# Altium PCB PCB1.PcbDoc
Units mil, origin at the board's own origin, x right, y up, seen from the top; angles counter-clockwise.
Board outline 1262.08 x 375.18 mil, 2 copper layers (Top Layer, Bottom Layer); 12 components, 12 nets, 61 pads, 11 vias.
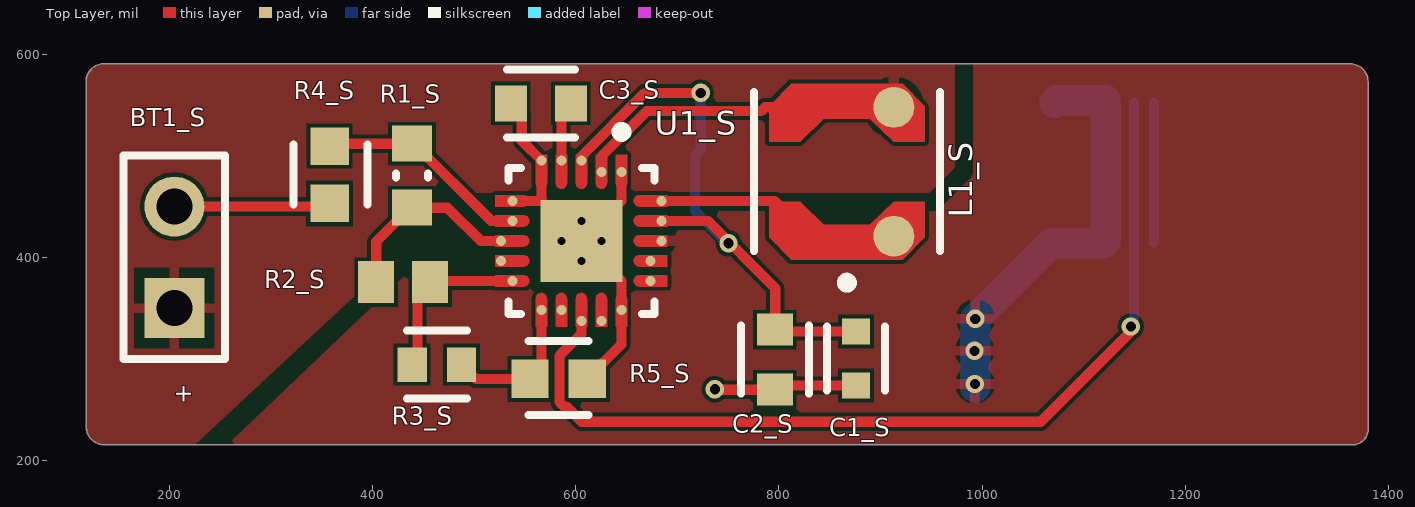
[diagram p0: Top Layer view]
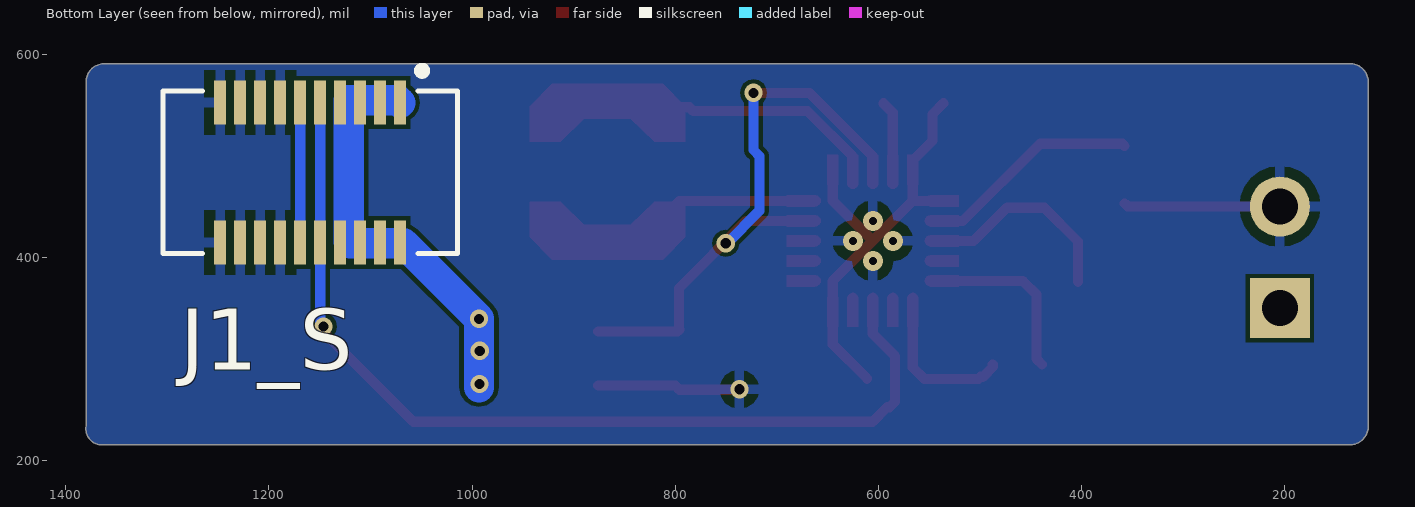
[diagram p1: Bottom Layer view, seen from below]
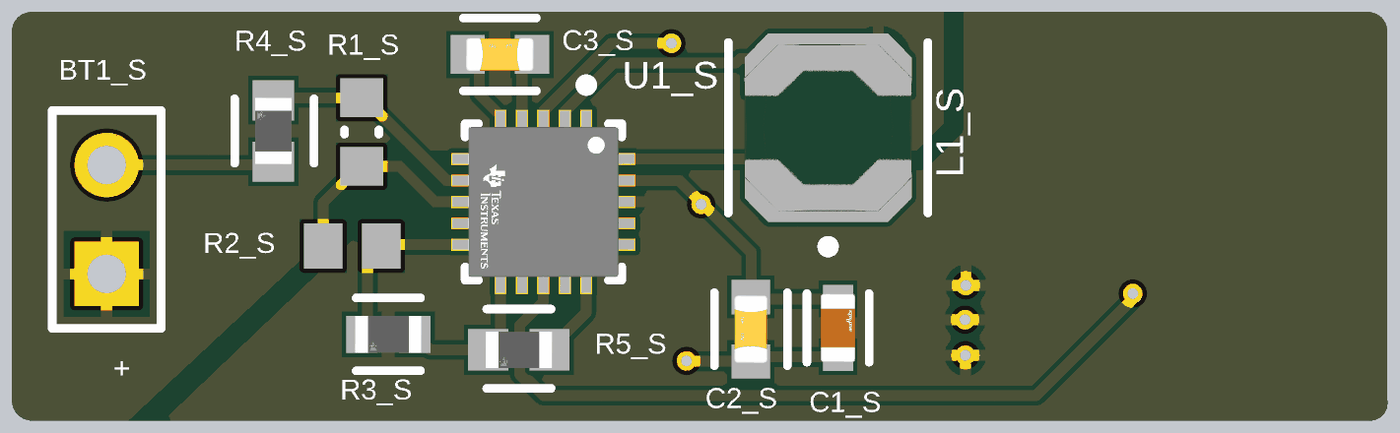
[diagram p2: 3D render of the assembled board from above, using the file's embedded part models]

## Layer stack, top to bottom
Top Solder: solder mask 0.4, Solder Resist, Dk 3.5
Top Layer: signal copper 1.4
Dielectric 1: dielectric 12.6, FR-4, Dk 4.8
Bottom Layer: signal copper 1.4
Bottom Solder: solder mask 0.4, Solder Resist, Dk 3.5

## Board outline
118.13,234.25 118.11,572.04 118.13,572.05 cw(c135.83,572.83) 136.22,590.55 1361.4,590.55 1361.42,590.53 cw(c1362.2,572.84) 1379.92,572.44 1379.92,234.25 cw(c1364.2,231.25) 1366.14,215.37 137.01,215.37 cw(c136.4,233.64)

## Design rules (kind name [scope] priority, off if disabled: settings)
Clearance [All] p1: gap=4 ignorepadtopadclearanceinfootprint=FALSE
PolygonConnect [All] p1: connectstyle=Relief reliefconductorwidth=10 reliefentries=4 polygonreliefangle="90 Angle" airgapwidth=10
RoutingVias [All] p1: holewidth=10 width=20 viastyle="Through Hole" minholewidth=8 minwidth=18 maxholewidth=28 maxwidth=50
SolderMaskExpansion [All] p1: expansion=4 istentingtop=FALSE
Width [All] p1: maxlimit=50 minlimit=4 preferedwidth=10
30 further rules are at their usual default settings.

## Components (designator, comment, footprint, x,y, rotation, side; value= is the part's Value field where it differs from the comment)
BT1_S "Solar cell" BAT-2 205,400 r90 top
C1_S "GRM188R60J475KE19D" FP-GRM188-0_1-MFG 875.98,300.39 r90 top
C2_S "CC0603KRX7R9BB103" FP-CC0603-DA-MFG 796.06,299.21 r270 top value="10 nF"
C3_S "CC0603KRX7R9BB103" FP-CC0603-DA-MFG 565.75,551.57 r180 top value="10 nF"
J1_S "53916-0208" "MOLEX-  539160208" 1159.45,473.62 r0 bottom
L1_S "LPS4018-223MRC" FP-LPS4018-MFG 866.93,484.25 r90 top
R1_S "7M32 1% 0603(1608)" RESC0603(1608)_N 438.98,480.31 r270 top value="7320000.00 Ohm"
R2_S "CRCW06031M87FKEA" RESC1609X50X30ML10T20 430.31,375.59 r180 top
R3_S "CRCW06035M49FKEA" FP-CRCW0603-e3-IPC_C 463.39,294.49 r180 top
R4_S "CRCW06035M62FKEA" FP-CRCW0603-e3-IPC_B 357.87,481.28 r90 top
R5_S "CRCW06035M62FKEA" FP-CRCW0603-e3-IPC_B 583.25,280.31 r180 top
U1_S "BQ25570RGRR" FP-RGR0020A-MFG 605.71,416.14 r270 top

## Footprints (in the part's own frame and the unit in brackets; to place one, negate y for a bottom-side part, rotate by r counter-clockwise, add the part's x,y. Pads: shape width x height; smd on the part's side, far side on the other; paste and mask are expansions set on the pad)
BAT-2 [mm] "Battery; 2 Leads"
  rect 1.5x1.5 hole 0.9: 1(-1.27,0)
  round 1.5 hole 0.9: 2(1.27,0)
  silkscreen extent -2.54,-1.27 2.54,1.27
FP-CC0603-DA-MFG [mm]
  rect 0.8x0.9 smd paste+0 mask+0: 1(-0.75,0) 2(0.75,0)
  silkscreen extent -0.85,-0.85 0.85,0.85, body extent -1.35,-0.75 1.35,0.75, height 0.25
FP-CRCW0603-e3-IPC_B [mil]
  rect 36.81x37.88 smd paste+0 mask+0: 1(-28.17,0) 2(28.17,0)
  silkscreen extent -30,-37 30,35, body extent -56,-29 56,29, height 10
FP-CRCW0603-e3-IPC_C [mil]
  rect 28.94x33.94 smd paste+0 mask+0: 1(-24.23,0) 2(24.23,0)
  silkscreen extent -30,-33 30,33, body extent -43,-23 43,23, height 10
FP-GRM188-0_1-MFG [mm]
  rect 0.65x0.7 smd paste+0 mask+0: 1(-0.675,0) 2(0.675,0)
  silkscreen extent -0.8,-0.72 0.8,0.72, body extent -1.1,-0.55 1.1,0.55, height 0.25
FP-LPS4018-MFG [mil]
  round 40.39 smd paste+0 mask+0: 1(-63.42,-46.25) 2(63.42,-46.25)
  Top Layer region: 86.61,-54.92 86.61,54.92 64.57,76.57 29.53,76.57 29.53,46.06 52.36,22.64 52.36,-22.64 29.53,-46.06 29.53,-76.57 64.57,-76.57
  Top Layer region: -86.61,-54.92 -86.61,54.92 -64.57,76.57 -29.53,76.57 -29.53,46.06 -52.36,22.64 -52.36,-22.64 -29.53,-46.06 -29.53,-76.57 -64.57,-76.57
  silkscreen extent -114,-92 78,92, body extent -91,-82 91,82, height 10
FP-RGR0020A-MFG [mm]
  round 0.252 smd paste-1000 mask+0: 1(-1.725,1) 2(-1.725,0.5) 3(-2.01,0) 4(-2.01,-0.5) 5(-2.01,-1) 6(-1,-1.725) 7(-0.5,-1.725) 8(0,-2.01) 9(0.5,-2.01) 10(1,-1.725) 11(1.725,-1) 12(1.725,-0.5) 13(2,0) 14(2,0.5) 15(1.725,1) 16(1,1.725) 17(0.5,1.725) 18(0,2) 19(-0.5,2) 20(-1,2)
  rect 2.05x2.05 smd paste-1000 mask+0: 21(0,0)
  Top Layer region: -0.86,2.15 -0.86,1.44 -0.871,1.386 -0.901,1.341 -0.946,1.311 -1,1.3 -1,1.3 -1.054,1.311 -1.099,1.341 -1.129,1.386 -1.14,1.44 -1.14,1.44 -1.14,2.15
  Top Layer region: -0.36,2.15 -0.36,1.44 -0.371,1.386 -0.401,1.341 -0.446,1.311 -0.5,1.3 -0.5,1.3 -0.554,1.311 -0.599,1.341 -0.629,1.386 -0.64,1.44 -0.64,1.44 -0.64,2.15
  Top Layer region: 0.14,2.15 0.14,1.44 0.129,1.386 0.099,1.341 0.054,1.311 0,1.3 0,1.3 -0.054,1.311 -0.099,1.341 -0.129,1.386 -0.14,1.44 -0.14,1.44 -0.14,2.15
  Top Layer region: 0.64,2.15 0.64,1.44 0.629,1.386 0.599,1.341 0.554,1.311 0.5,1.3 0.5,1.3 0.446,1.311 0.401,1.341 0.371,1.386 0.36,1.44 0.36,1.44 0.36,2.15
  Top Layer region: 1.14,2.15 1.14,1.44 1.129,1.386 1.099,1.341 1.054,1.311 1,1.3 1,1.3 0.946,1.311 0.901,1.341 0.871,1.386 0.86,1.44 0.86,1.44 0.86,2.15
  Top Layer region: 2.15,0.86 1.44,0.86 1.386,0.871 1.341,0.901 1.311,0.946 1.3,1 1.3,1 1.311,1.054 1.341,1.099 1.386,1.129 1.44,1.14 1.44,1.14 2.15,1.14
  Top Layer region: 2.15,0.36 1.44,0.36 1.386,0.371 1.341,0.401 1.311,0.446 1.3,0.5 1.3,0.5 1.311,0.554 1.341,0.599 1.386,0.629 1.44,0.64 1.44,0.64 2.15,0.64
  Top Layer region: 2.15,-0.14 1.44,-0.14 1.386,-0.129 1.341,-0.099 1.311,-0.054 1.3,0 1.3,0 1.311,0.054 1.341,0.099 1.386,0.129 1.44,0.14 1.44,0.14 2.15,0.14
  Top Layer region: 2.15,-0.64 1.44,-0.64 1.386,-0.629 1.341,-0.599 1.311,-0.554 1.3,-0.5 1.3,-0.5 1.311,-0.446 1.341,-0.401 1.386,-0.371 1.44,-0.36 1.44,-0.36 2.15,-0.36
  Top Layer region: 2.15,-1.14 1.44,-1.14 1.386,-1.129 1.341,-1.099 1.311,-1.054 1.3,-1 1.3,-1 1.311,-0.946 1.341,-0.901 1.386,-0.871 1.44,-0.86 1.44,-0.86 2.15,-0.86
  Top Layer region: 0.86,-2.15 0.86,-1.44 0.871,-1.386 0.901,-1.341 0.946,-1.311 1,-1.3 1,-1.3 1.054,-1.311 1.099,-1.341 1.129,-1.386 1.14,-1.44 1.14,-1.44 1.14,-2.15
  Top Layer region: 0.36,-2.15 0.36,-1.44 0.371,-1.386 0.401,-1.341 0.446,-1.311 0.5,-1.3 0.5,-1.3 0.554,-1.311 0.599,-1.341 0.629,-1.386 0.64,-1.44 0.64,-1.44 0.64,-2.15
  Top Layer region: -0.14,-2.15 -0.14,-1.44 -0.129,-1.386 -0.099,-1.341 -0.054,-1.311 0,-1.3 0,-1.3 0.054,-1.311 0.099,-1.341 0.129,-1.386 0.14,-1.44 0.14,-1.44 0.14,-2.15
  Top Layer region: -0.64,-2.15 -0.64,-1.44 -0.629,-1.386 -0.599,-1.341 -0.554,-1.311 -0.5,-1.3 -0.5,-1.3 -0.446,-1.311 -0.401,-1.341 -0.371,-1.386 -0.36,-1.44 -0.36,-1.44 -0.36,-2.15
  Top Layer region: -1.14,-2.15 -1.14,-1.44 -1.129,-1.386 -1.099,-1.341 -1.054,-1.311 -1,-1.3 -1,-1.3 -0.946,-1.311 -0.901,-1.341 -0.871,-1.386 -0.86,-1.44 -0.86,-1.44 -0.86,-2.15
  Top Layer region: -2.15,-0.86 -1.44,-0.86 -1.386,-0.871 -1.341,-0.901 -1.311,-0.946 -1.3,-1 -1.3,-1 -1.311,-1.054 -1.341,-1.099 -1.386,-1.129 -1.44,-1.14 -1.44,-1.14 -2.15,-1.14
  Top Layer region: -2.15,-0.36 -1.44,-0.36 -1.386,-0.371 -1.341,-0.401 -1.311,-0.446 -1.3,-0.5 -1.3,-0.5 -1.311,-0.554 -1.341,-0.599 -1.386,-0.629 -1.44,-0.64 -1.44,-0.64 -2.15,-0.64
  Top Layer region: -2.15,0.14 -1.44,0.14 -1.386,0.129 -1.341,0.099 -1.311,0.054 -1.3,0 -1.3,0 -1.311,-0.054 -1.341,-0.099 -1.386,-0.129 -1.44,-0.14 -1.44,-0.14 -2.15,-0.14
  Top Layer region: -2.15,0.64 -1.44,0.64 -1.386,0.629 -1.341,0.599 -1.311,0.554 -1.3,0.5 -1.3,0.5 -1.311,0.446 -1.341,0.401 -1.386,0.371 -1.44,0.36 -1.44,0.36 -2.15,0.36
  Top Layer region: -2.15,1.14 -1.44,1.14 -1.386,1.129 -1.341,1.099 -1.311,1.054 -1.3,1 -1.3,1 -1.311,0.946 -1.341,0.901 -1.386,0.871 -1.44,0.86 -1.44,0.86 -2.15,0.86
  silkscreen extent -2.85,-1.83 1.83,1.83, body extent -2.25,-2.25 2.25,2.25, height 0.25
"MOLEX-  539160208" [mm]
  rect 0.3x1.1 smd: 1(-2.25,1.5) 2(-2.25,-2) 3(-1.75,1.5) 4(-1.75,-2) 5(-1.25,1.5) 6(-1.25,-2) 7(-0.75,1.5) 8(-0.75,-2) 9(-0.25,1.5) 10(-0.25,-2) 11(0.25,1.5) 12(0.25,-2) 13(0.75,1.5) 14(0.75,-2) 15(1.25,1.5) 16(1.25,-2) 17(1.75,1.5) 18(1.75,-2) 19(2.25,1.5) 20(2.25,-2)
  silkscreen extent -3.68,-2.89 3.68,1.78, body extent -3.65,-2.3 3.65,1.8, height 3.46
RESC0603(1608)_N [mm] "Chip Resistor, Body 1.6x0.8mm, IPC Medium Density"
  rect 0.9x1 smd: 1(-0.8,0) 2(0.8,0)
  silkscreen extent -0.05,-0.4 0.05,0.4, body extent -0.85,-0.47 0.85,0.47, height 0.6
RESC1609X50X30ML10T20 [mm] "Chip Resistor, 2-Leads, Body 1.55x0.85mm, IPC Low Density"
  rect 0.9x1.05 smd: 1(-0.675,0) 2(0.675,0)
  body extent -0.82,-0.48 0.82,0.48, height 0.5

## Part data
BT1_S: library part Battery, "Multicell Battery", LatestRevisionDate=17-Jul-2002, LatestRevisionNote="Re-released for DXP Platform.", PackageDescription="Battery; 2 Leads", PackageReference=BAT-2, Published=24-Mar-1999, Publisher="Altium Limited"
C1_S: library part CMP-2006-02799-3, "CAP CER 4.7UF 6.3V X5R 0603", Capacitance=4.7uF, Case Code (Imperial)=0603, Case Code (Metric)=1608, Dielectric=X5R, Max Operating Temperature=85°C, Min Operating Temperature=-55°C, Package Quantity=1, Tolerance=10%, Voltage=6.3V, Case/Package=0603, Depth=0.8mm, Height=0.8mm, Lead Free="Lead Free", Length=1.6mm, Material=Ceramic, Mount="Surface Mount", Packaging="Tape and Reel", Radiation Hardening=No, REACH SVHC="No SVHC", RoHS Compliant=Yes, Termination=SMD/SMT, Thickness=0.035inch, Voltage Rating=6.3V, Voltage Rating (DC)=6.3V, Width=0.8mm
C2_S C3_S: library part CMP-2100-03600-2, "CAP CER 10000PF 50V X7R 0603", Capacitance="10 nF", Manufacturer=YAGEO, Package=CC0603-DA, Temperature="-55°C to +125°C", Temperature Characteristic=X7R, Temperature Coefficient=15%, Temperature Range High=+125°C, Temperature Range Low=-55°C, Tolerance=0.1, Voltage="50 V", Automotive=No, Category=Cap, ComponentLink2Description=Datasheet, ComponentLink2URL=http://www.yageo.com/documents/recent/UPY-GPHC_X7R_6.3V-to-50V_18.pdf, Device Class L1="Passive Components", Device Class L2=Capacitors, Device Class L3="Ceramic Capacitors", Digikey Description="CAP CER 10000PF 50V X7R 0603", Footprint Url=http://www.yageo.com/exep/pages/download/literatures/UPY-C_GEN_24.pdf, Height=0.9mm, Lead Free=Yes, Manufacturer Part Number=CC0603KRX7R9BB103, Material=Ceramic, Mouser Description="Multilayer Ceramic Capacitor, CC Series, 0.01 - F, - 10%, X7R, 50 V, 0603 [1608 Metric]", Octopart=https://octopart.com/cc0603krx7r9bb103-yageo-192938, RoHS=TRUE, Voltage Rating="50 V"
L1_S: library part CMP-11268-000029-2, "Fixed Inductors LPS4018 Low Profile 22uH 0.9A 20% SMD", Case/Package=SMD/SMT, DC Resistance (DCR)=360mR, Inductance=22uH, Max DC Current=830mA, Max Operating Temperature=85°C, Min Operating Temperature=-40°C, Package Quantity=1000, Self Resonant Frequency=26MHz, Test Frequency=100kHz, Tolerance=20%, Core Material=Ferrite, Height=1.7mm, Length=4mm, Packaging="Tape and Reel", Series=LPS4018, Shielding=Shielded, Termination=SMD/SMT, Weight=0.003527oz, Width=4mm
R1_S: library part CMP-1012-00947-1, "7M32 0.1W 1% 0603 (1608 Metric)  SMD", Case-EIA=0603, Case-Metric=1608, Power="0.1 W", Tolerance="1 %", Technology=SMT
R2_S: library part CMP-1012-00878-2, Manufacturer="Vishay Dale", Part Number=CRCW06031M87FKEA
R3_S: library part CMP-02407-002627-1, "RES Thick Film, 5.49MΩ, 1%, 0.1W, 100ppm/°C, 0603", Case Code (Imperial)=0603, Case Code (Metric)=1608, Max Operating Temperature=155°C, Max Power Dissipation=100mW, Min Operating Temperature=-55°C, Package Quantity=10, Resistance=5.49MR, Temperature Coefficient=100ppm/°C, Tolerance=1%, Voltage Rating=75V, Case/Package=0603, Composition="Thick Film", Contact Plating=Tin, Depth=0.85mm, Features="Automotive AEC-Q200", Height=0.02inch, Lead Free="Lead Free", Length=1.55mm, Military Standard=Not, Number of Pins=2, Number of Terminations=2, Packaging="Tape and Reel", Power Rating=100mW, Radiation Hardening=No, Termination=SMD/SMT, Voltage Rating (DC)=75V, Weight=7.1E-05oz, Width=0.033inch
R4_S R5_S: library part CMP-02407-011800-1, "RES Thick Film, 5.62MΩ, 1%, 0.1W, 100ppm/°C, 0603", Case Code (Imperial)=0603, Case Code (Metric)=1608, Max Operating Temperature=155°C, Max Power Dissipation=100mW, Min Operating Temperature=-55°C, Package Quantity=10, Resistance=5.62MR, Resistance Tolerance=1%, Resistor Type="Thick Film", Temperature Coefficient=100ppm/°C, Voltage Rating=75V, Case/Package=0603, Construction=Rectangular, Contact Plating=Tin, Depth=0.85mm, Features="Automotive AEC-Q200", Height=0.02inch, Lead Free="Lead Free", Length=1.55mm, Military Standard=Not, Number of Pins=2, Number of Terminations=2, Packaging="Tape and Reel", Power Rating=100mW, RoHS Compliant=Yes, Series=CRCW, Tolerance=1%, Voltage Rating (DC)=75V, Weight=7.1E-05oz, Width=0.033inch
U1_S: library part CMP-04911-000040-1, "IC ENERGY HARV CTRLR BATT 20VQFN", Case/Package=VQFN, Max Operating Temperature=125°C, Min Operating Temperature=-40°C, Operating Supply Current=488nA, Operating Supply Voltage=4V, Output Current=100mA, Package Quantity=3000, Switching Frequency=1MHz, Contact Plating=Gold, Lead Free="Lead Free", Mount="Surface Mount", Number of Pins=20, Packaging="Tape and Reel", RoHS Compliant=Yes

## Via types
v1: diameter 18, hole 10, Top Layer to Bottom Layer, 7 vias
v2: diameter 19.68, hole 7.87, Top Layer to Bottom Layer, 4 vias

## Nets (pads, with @x,y where several pads share a name; then routed paths per layer and width w, separated by ;. In a path a pad name is that pad's centre, name@x,y a point inside that pad or via, vN(x,y) a via of type N, cw(c..) or ccw(c..) an arc to the next point about the centre after c; other vN are vias at no path point)
AIN0: J1_S.9 J1_S.10 U1_S.13 | length 929.7
  Top Layer w10: 605.71,344.29 U1_S.13 605.71,324.68 584.01,302.98 584.01,257.65 589.28,252.38 591.72,252.38 605.91,238.19 1057.87,238.19 1146.46,326.77 v1(1146.46,331.89)
  Bottom Layer w10: v1(1146.46,331.89) 1146.46,334.05 1149.61,337.2 J1_S.9 J1_S.10
AIN1: J1_S.11 J1_S.12 | length 137.8
  Bottom Layer w10: J1_S.11 J1_S.12
EH_VOUT: J1_S.1 J1_S.2 J1_S.3 J1_S.4 J1_S.5 J1_S.6 J1_S.7 J1_S.8 U1_S.18 | length 418.3
  Bottom Layer w30: v1@993.31,272.05 v1(993.31,339.45) 1067.64,413.78 1120.08,413.78 1121.65,415.35 1121.65,554.72 1073.23,554.72 J1_S.2
  other v1: 992.91,275.28 992.52,307.95
GND: BT1_S.2 C1_S.1 C2_S.2 C3_S.2 J1_S.13 J1_S.14 J1_S.15 J1_S.16 J1_S.17 J1_S.18 J1_S.19 J1_S.20 R4_S.1 R5_S.1 U1_S.1 U1_S.5 U1_S.6 U1_S.15 U1_S.21 | length 738.1
  Top Layer w10: BT1_S.2 354.76,450 R4_S.1 ; C3_S.2 546.97,540.83 546.97,514.65 U1_S.5 U1_S.21@566.34,455.51 ; U1_S.6 U1_S.21@566.34,455.51 ; R5_S.1 611.42,280.85 645.08,314.51 645.08,376.77 U1_S.21 ; U1_S.1 645.08,455.51 U1_S.21 ; v1(737.01,270.08) 737.4,269.69 C2_S.2 800.2,273.82 C1_S.1 ; U1_S.21@566.34,455.51 U1_S.21
  other v2: 605.71,396.46 586.02,416.14 625.39,416.14 605.71,435.83
NetC3_S_1: C3_S.1 U1_S.4 | length 60.1
  Top Layer w10: U1_S.4 586.02,542.32 C3_S.1
NetL1_S_1: L1_S.1 U1_S.20 | length 247.3
  Top Layer w10: U1_S.20 795.67,455.51 835.43,415.75 908.1,415.75 L1_S.1
OK_HYST: R2_S.1 R3_S.2 U1_S.10 | length 169.8
  Top Layer w10: R3_S.2 444.49,299.82 444.49,363.19 R2_S.1 458.07,376.77 U1_S.10
OK_PROG: R3_S.1 R5_S.2 U1_S.11 | length 147.4
  Top Layer w10: R3_S.1 487.61,291.99 497.08,282.52 499.58,282.52 501.79,280.31 R5_S.2 566.34,291.57 U1_S.11
SOLAR_VCC: BT1_S.1 L1_S.2 U1_S.2 | length 323.1
  Top Layer w10: U1_S.2 625.39,499.34 669.9,543.85 782.61,543.85 786.43,547.67 L1_S.2
VBAT_OV: R1_S.1 R4_S.2 U1_S.7 | length 212.4
  Top Layer w10: R4_S.2 360.24,511.81 440.94,511.81 516.93,435.83 U1_S.7
VRDIV: R1_S.2 R2_S.2 U1_S.8 | length 190.1
  Top Layer w10: R2_S.2 403.74,415.55 437.01,448.82 R1_S.2 473.78,448.82 506.46,416.14 U1_S.8
VSTOR: C1_S.2 C2_S.1 U1_S.3 U1_S.19 | length 573.9
  Top Layer w10: U1_S.3 605.71,499.46 668.1,561.85 v1(723.11,561.85) ; U1_S.19 730.32,435.83 796.46,369.69 796.46,329.13 C2_S.1 797.83,326.97 C1_S.2
  Bottom Layer w10: v1(723.11,561.85) 723.11,505.57 717.32,499.79 717.32,445.67 749.61,413.39 749.95,413.39 v1(750.46,413.89)
pads on no net: U1_S.9 U1_S.12 U1_S.14 U1_S.16 U1_S.17

## Polygon pours and split planes (outlines as drawn)
SOLAR_VCC on Top Layer "SOLAR_VCC_L01_P000" (solid, pour order 3): 136.22,590.55 973.28,590.55 973.28,488.37 948.24,463.33 494.49,463.33 ccw(c494.49,454.34) 488.12,460.69 225.2,215.37 136.62,215.37 cw(c137.58,234.94) 118.11,237.19 118.11,572.04 118.13,572.05 cw(c135.83,572.83)
EH_VOUT on Top Layer "EH_VOUT_L01_P000" (solid, pour order 2): 257.09,215.37 498.22,445.33 951.97,445.33 ccw(c951.97,454.33) 958.33,447.97 988.65,478.28 ccw(c982.29,484.64) 991.28,484.65 991.28,590.55 1361.4,590.55 1361.42,590.53 cw(c1362.2,572.84) 1379.92,572.44 1380.08,229.31 1380.17,230.32 cw(c1364.22,231.22) 1362.26,215.37
GND on Bottom Layer "GND_L02_P004" (solid, pour order 4): 118.13,234.25 118.11,572.04 118.13,572.05 cw(c135.83,572.83) 136.22,590.55 1361.4,590.55 1361.42,590.53 cw(c1362.2,572.84) 1379.92,572.44 1379.92,234.25 cw(c1364.2,231.25) 1366.14,215.37 137.01,215.37 cw(c136.4,233.64)

## Silkscreen, mask and mechanical layers (free items; w line width, h text height)
Mechanical 1:
  lines w10: 1361.42,590.53 cw(c1362.2,572.84) 1379.92,572.44 1379.92,234.25 cw(c1364.2,231.25) 1366.14,215.37 137.01,215.37 cw(c136.4,233.64) 118.13,234.25 118.11,572.04 118.13,572.05 cw(c135.83,572.83) 136.22,590.55 1361.4,590.55 ; 1361.4,590.55 1361.42,590.53

## Text inside footprints (layer, text, board x,y; h text height)
BT1_S: Top Overlay "+" at 227.72,255.51 h30 r90